# Altium PCB F407ZGT6.PcbDoc (part 3 of 7)
Units mil, origin at the board's own origin, x right, y up, seen from the top; angles counter-clockwise.
Board outline 4380 x 3940 mil, 2 copper layers (Top Layer, Bottom Layer); 88 components, 146 nets, 552 pads, 268 vias.
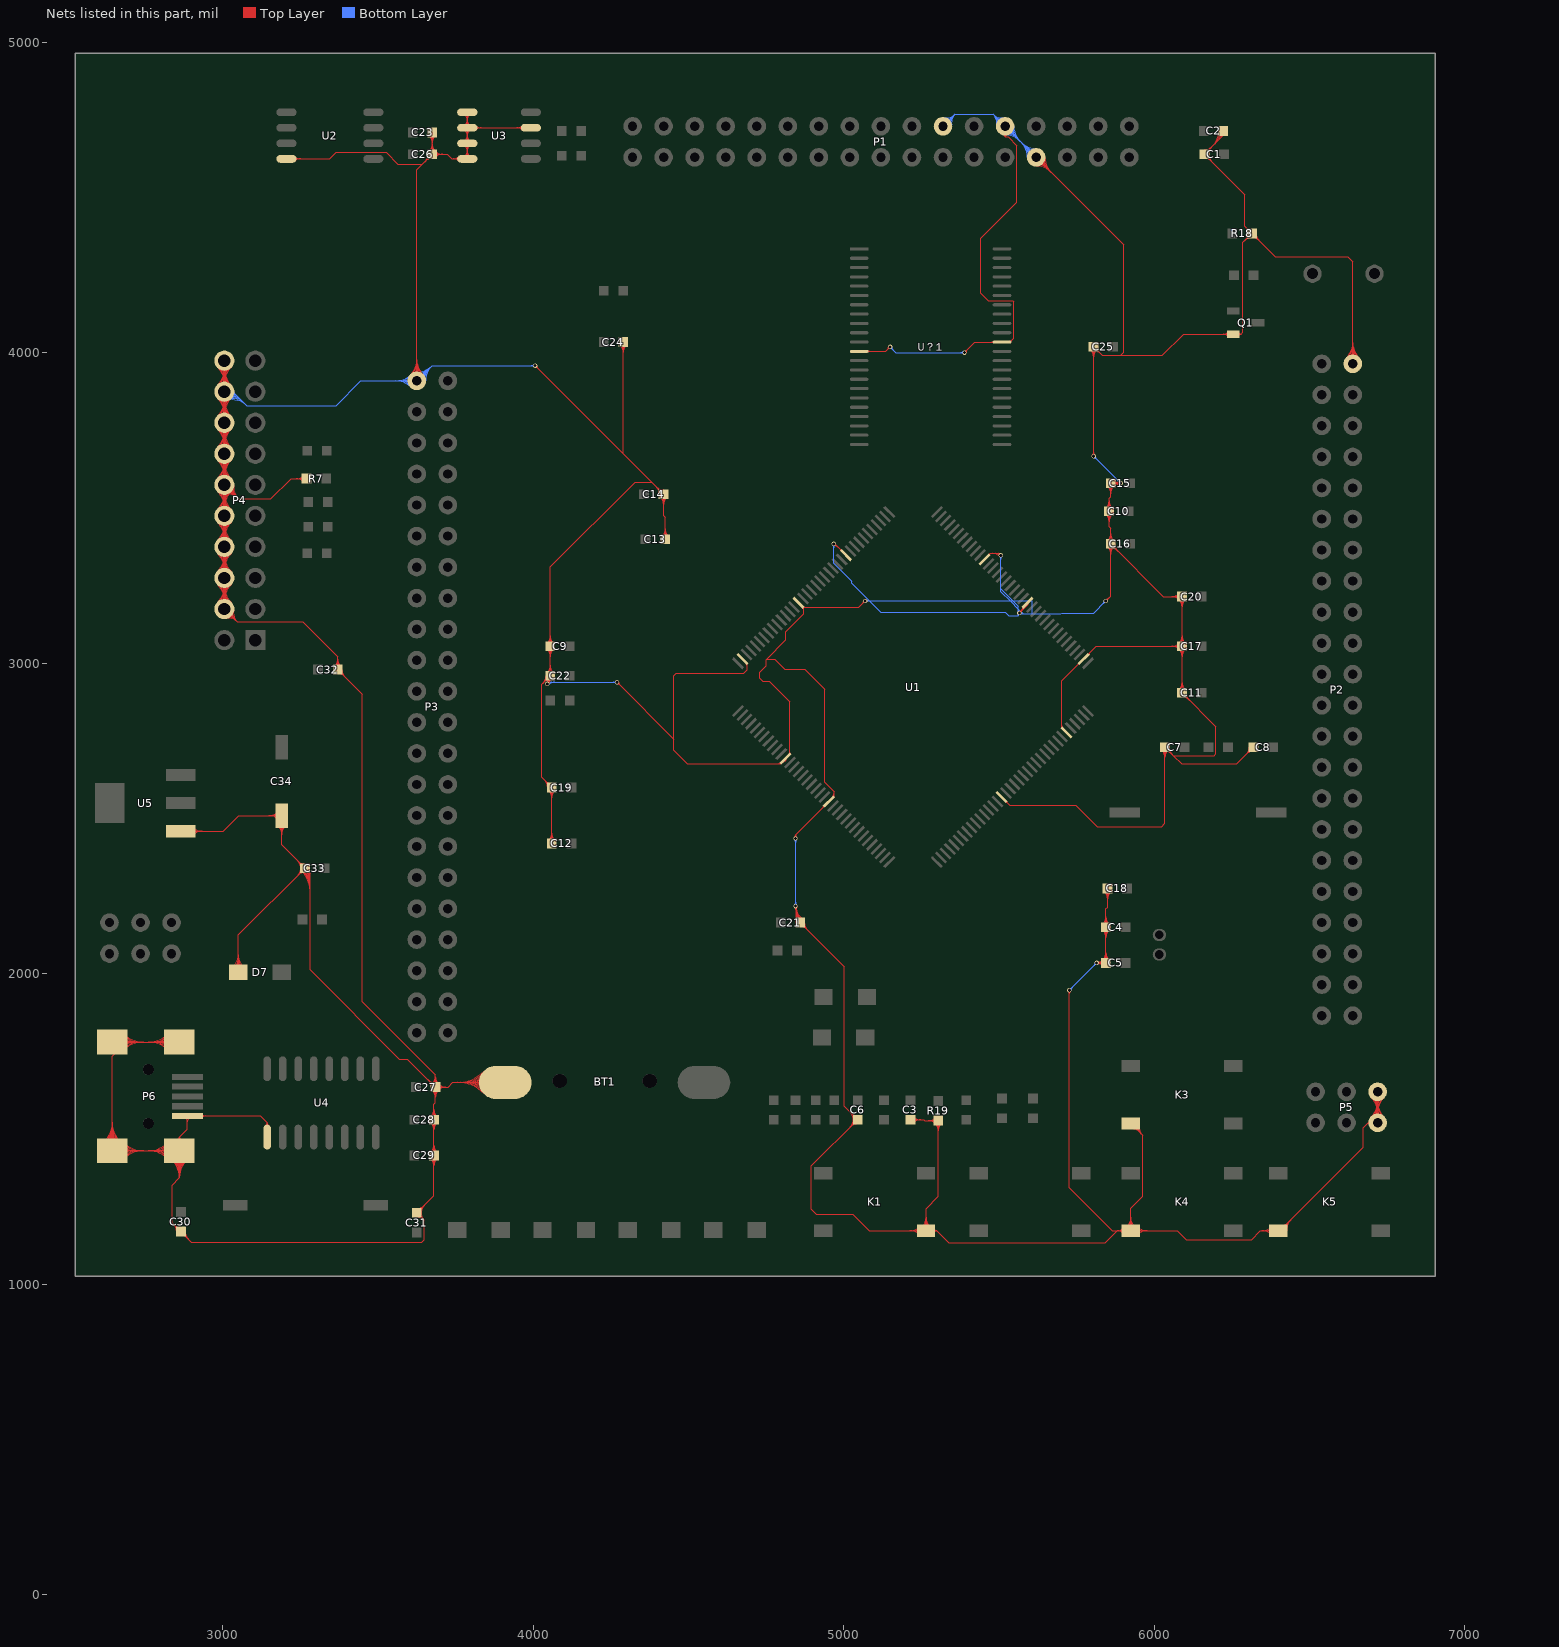
[diagram p3: the nets of this part, all layers, seen from the top]

## Via types
v1: diameter 14, hole 10, Top Layer to Bottom Layer, 265 vias
v2: diameter 150, hole 150, Top Layer to Bottom Layer, 3 vias

## Nets (pads, with @x,y where several pads share a name; then routed paths per layer and width w, separated by ;. In a path a pad name is that pad's centre, name@x,y a point inside that pad or via, vN(x,y) a via of type N, cw(c..) or ccw(c..) an arc to the next point about the centre after c; other vN are vias at no path point) (continued)
GND: BT1.2 C1.2 C2.2 C3.1 C4.1 C5.1 C6.1 C7.1 C8.1 C9.1 C10.1 C11.1 C12.1 C13.1 C14.1 C15.1 C16.1 C17.1 C18.1 C19.1 C20.1 C21.1 C22.1 C23.1 C24.1 C25.1 C26.1 C27.1 C28.1 C29.1 C30.1 C31.1 C32.1 C33.1 C34.2 D7.2 K1.4 K3.2 K4.2 K5.2 P1.22 P1.26 P1.27 P2.43 P3.44 P4.4 P4.6 P4.8 P4.10 P4.12 P4.14 P4.16 P4.18 P4.20 P5.5 P5.6 P6.5 P6.6 P6.7 P6.8 P6.9 Q1.2 R7.1 R18.1 R19.2 U1.16 U1.31 U1.38 U1.51 U1.61 U1.83 U1.94 U1.107 U1.120 U1.130 U2.4 U3.1 U3.2 U3.3 U3.4 U3.7 U4.1 U5.1 U？1.12 U？1.34 | length 58992.2
  Top Layer w4: P6.7@2616.99,1456.67 ccw(c2552.12,1521.54) 2643.86,1521.54 ccw(c2735.6,1521.54) P6.7@2670.73,1456.67 ; P6.7@2619.82,1453.85 ccw(c2561.77,1511.89) 2643.86,1511.89 ccw(c2725.94,1511.89) P6.7@2667.9,1453.85 ; P6.7@2622.64,1451.02 ccw(c2571.43,1502.23) 2643.86,1502.23 ccw(c2716.28,1502.23) P6.7@2665.07,1451.02 ; P6.7@2625.47,1448.19 ccw(c2581.09,1492.57) 2643.86,1492.57 ccw(c2706.63,1492.57) P6.7@2662.24,1448.19 ; P6.7@2628.3,1445.36 ccw(c2590.75,1482.92) 2643.86,1482.92 ccw(c2696.97,1482.92) P6.7@2659.41,1445.36 ; P6.7@2631.13,1442.53 ccw(c2600.4,1473.26) 2643.86,1473.26 ccw(c2687.31,1473.26) P6.7@2656.59,1442.53 ; P6.8@2643.86,1780.2 P6.8@2690,1780.2 ; P6.7@2665.8,1417.08 cw(c2696.53,1386.35) 2696.53,1429.8 cw(c2696.53,1473.26) P6.7@2665.8,1442.53 ; P6.8@2665.8,1767.47 cw(c2696.53,1736.74) 2696.53,1780.2 cw(c2696.53,1823.65) P6.8@2665.8,1792.92 ; P6.7@2668.63,1414.25 cw(c2706.18,1376.69) 2706.18,1429.8 cw(c2706.18,1482.92) P6.7@2668.63,1445.36 ; P6.8@2668.63,1764.64 cw(c2706.18,1727.08) 2706.18,1780.2 cw(c2706.18,1833.31) P6.8@2668.63,1795.75 ; P6.7@2671.46,1411.42 cw(c2715.84,1367.03) 2715.84,1429.8 cw(c2715.84,1492.57) P6.7@2671.46,1448.19 ; P6.8@2671.46,1761.81 cw(c2715.84,1717.43) 2715.84,1780.2 cw(c2715.84,1842.97) P6.8@2671.46,1798.58 ; P6.7@2674.28,1408.59 cw(c2725.5,1357.38) 2725.5,1429.8 cw(c2725.5,1502.23) P6.7@2674.28,1451.02 ; P6.8@2674.28,1758.98 cw(c2725.5,1707.77) 2725.5,1780.2 cw(c2725.5,1852.62) P6.8@2674.28,1801.41 ; P6.7@2677.11,1405.76 cw(c2735.15,1347.72) 2735.15,1429.8 cw(c2735.15,1511.89) P6.7@2677.11,1453.85 ; P6.8@2677.11,1756.15 cw(c2735.15,1698.11) 2735.15,1780.2 cw(c2735.15,1862.28) P6.8@2677.11,1804.24 ; P6.7@2679.94,1402.93 cw(c2744.81,1338.06) 2744.81,1429.8 cw(c2744.81,1521.54) P6.7@2679.94,1456.67 ; P6.8@2679.94,1753.33 cw(c2744.81,1688.46) 2744.81,1780.2 cw(c2744.81,1871.94) P6.8@2679.94,1807.07 ; P6.6@2824.31,1402.93 ccw(c2759.44,1338.06) 2759.44,1429.8 ccw(c2759.44,1521.54) P6.6@2824.31,1456.67 ; P6.9@2824.31,1753.33 ccw(c2759.44,1688.46) 2759.44,1780.2 ccw(c2759.44,1871.94) P6.9@2824.31,1807.07 ; P6.6@2827.14,1405.76 ccw(c2769.1,1347.72) 2769.1,1429.8 ccw(c2769.1,1511.89) P6.6@2827.14,1453.85 ; P6.9@2827.14,1756.15 ccw(c2769.1,1698.11) 2769.1,1780.2 ccw(c2769.1,1862.28) P6.9@2827.14,1804.24 ; P6.6@2829.97,1408.59 ccw(c2778.76,1357.38) 2778.76,1429.8 ccw(c2778.76,1502.23) P6.6@2829.97,1451.02 ; P6.9@2829.97,1758.98 ccw(c2778.76,1707.77) 2778.76,1780.2 ccw(c2778.76,1852.62) P6.9@2829.97,1801.41 ; P6.6@2832.8,1411.42 ccw(c2788.41,1367.03) 2788.41,1429.8 ccw(c2788.41,1492.57) P6.6@2832.8,1448.19 ; P6.9@2832.8,1761.81 ccw(c2788.41,1717.43) 2788.41,1780.2 ccw(c2788.41,1842.97) P6.9@2832.8,1798.58 ; P6.6@2834.62,1401.88 cw(c2780.26,1343.01) 2860.39,1343.01 ; P6.6@2835.63,1414.25 ccw(c2798.07,1376.69) 2798.07,1429.8 ccw(c2798.07,1482.92) P6.6@2835.63,1445.36 ; P6.9@2835.63,1764.64 ccw(c2798.07,1727.08) 2798.07,1780.2 ccw(c2798.07,1833.31) P6.9@2835.63,1795.75 ; P6.6@2837.33,1404.82 cw(c2788.7,1352.14) 2860.39,1352.14 cw(c2932.09,1352.14) P6.6@2883.46,1404.82 ; P6.6@2838.45,1417.08 ccw(c2807.73,1386.35) 2807.73,1429.8 ccw(c2807.73,1473.26) P6.6@2838.45,1442.53 ; P6.9@2838.45,1767.47 ccw(c2807.73,1736.74) 2807.73,1780.2 ccw(c2807.73,1823.65) P6.9@2838.45,1792.92 ; P6.6@2840.04,1407.76 cw(c2797.13,1361.28) 2860.39,1361.28 cw(c2923.66,1361.28) P6.6@2880.74,1407.76 ; P6.6@2842.76,1410.7 cw(c2805.57,1370.42) 2860.39,1370.42 cw(c2915.22,1370.42) P6.6@2878.03,1410.7 ; P6.6@2845.47,1413.64 cw(c2814,1379.55) 2860.39,1379.55 cw(c2906.79,1379.55) P6.6@2875.32,1413.64 ; P6.6@2848.18,1416.58 cw(c2822.44,1388.69) 2860.39,1388.69 cw(c2898.35,1388.69) P6.6@2872.6,1416.58 ; C30.1@2851.25,1170 ccw(c2818.06,1170) 2841.53,1193.47 ccw(c2865,1216.94) C30.1@2865,1183.75 ; C30.1@2855.25,1170 ccw(c2831.72,1170) 2848.36,1186.64 ccw(c2865,1203.28) C30.1@2865,1179.75 ; P6.6@2855.55,1467.49 ccw(c2854.84,1473) 2860.39,1473 ; P6.9@2860.39,1780.2 P6.8@2690,1780.2 ; U5.1@2864.17,2459.45 3001,2459.45 3051.32,2509.76 C34.2@3190,2509.76 3190,2415 C33.1@3265,2340 ; C30.1@2865,1156.25 cw(c2865,1123.06) 2888.47,1146.53 cw(c2911.94,1170) C30.1@2878.75,1170 ; C30.1@2865,1160.25 cw(c2865,1136.72) 2881.64,1153.36 cw(c2898.28,1170) C30.1@2874.75,1170 ; P6.6@2865.24,1467.49 cw(c2865.94,1473) 2860.39,1473 ; P6.5@2880.33,1536.35 cw(c2866.67,1522.69) 2885.98,1522.69 cw(c2905.3,1522.69) P6.5@2891.64,1536.35 ; P6.6@2886.17,1401.88 ccw(c2940.53,1343.01) 2860.39,1343.01 ; U5.1@2898.58,2452.6 cw(c2915.11,2436.07) 2915.11,2459.45 cw(c2915.11,2482.83) U5.1@2898.58,2466.3 ; U5.1@2901.41,2449.77 cw(c2924.77,2426.41) 2924.77,2459.45 cw(c2924.77,2492.49) U5.1@2901.41,2469.12 ; U5.1@2904.24,2446.94 cw(c2934.43,2416.75) 2934.43,2459.45 cw(c2934.43,2502.14) U5.1@2904.24,2471.95 ; P6.5@2931.64,1536.35 cw(c2945.3,1522.69) 2945.3,1542.01 cw(c2945.3,1561.32) P6.5@2931.64,1547.66 ; P4.4@2983.43,3196.57 ccw(c2931.37,3248.63) 3005,3248.63 ccw(c3078.63,3248.63) P4.4@3026.57,3196.57 ; P4.6@2983.43,3253.43 cw(c2931.37,3201.37) 3005,3201.37 cw(c3078.63,3201.37) P4.6@3026.57,3253.43 ; P4.6@2983.43,3296.57 ccw(c2931.37,3348.63) 3005,3348.63 ccw(c3078.63,3348.63) P4.6@3026.57,3296.57 ; P4.8@2983.43,3353.43 cw(c2931.37,3301.37) 3005,3301.37 cw(c3078.63,3301.37) P4.8@3026.57,3353.43 ; P4.8@2983.43,3396.57 ccw(c2931.37,3448.63) 3005,3448.63 ccw(c3078.63,3448.63) P4.8@3026.57,3396.57 ; P4.10@2983.43,3453.43 cw(c2931.37,3401.37) 3005,3401.37 cw(c3078.63,3401.37) P4.10@3026.57,3453.43 ; P4.10@2983.43,3496.57 ccw(c2931.37,3548.63) 3005,3548.63 ccw(c3078.63,3548.63) P4.10@3026.57,3496.57 ; P4.12@2983.43,3553.43 cw(c2931.37,3501.37) 3005,3501.37 cw(c3078.63,3501.37) P4.12@3026.57,3553.43 ; P4.12@2983.43,3596.57 ccw(c2931.37,3648.63) 3005,3648.63 ccw(c3078.63,3648.63) P4.12@3026.57,3596.57 ; P4.14@2983.43,3653.43 cw(c2931.37,3601.37) 3005,3601.37 cw(c3078.63,3601.37) P4.14@3026.57,3653.43 ; P4.14@2983.43,3696.57 ccw(c2931.37,3748.63) 3005,3748.63 ccw(c3078.63,3748.63) P4.14@3026.57,3696.57 ; P4.16@2983.43,3753.43 cw(c2931.37,3701.37) 3005,3701.37 cw(c3078.63,3701.37) P4.16@3026.57,3753.43 ; P4.16@2983.43,3796.57 ccw(c2931.37,3848.63) 3005,3848.63 ccw(c3078.63,3848.63) P4.16@3026.57,3796.57 ; P4.18@2983.43,3853.43 cw(c2931.37,3801.37) 3005,3801.37 cw(c3078.63,3801.37) P4.18@3026.57,3853.43 ; P4.18@2983.43,3896.57 ccw(c2931.37,3948.63) 3005,3948.63 ccw(c3078.63,3948.63) P4.18@3026.57,3896.57 ; P4.20@2983.43,3953.43 cw(c2931.37,3901.37) 3005,3901.37 cw(c3078.63,3901.37) P4.20@3026.57,3953.43 ; P4.4@2986.26,3193.74 ccw(c2941.02,3238.98) 3005,3238.98 ccw(c3068.98,3238.98) P4.4@3023.74,3193.74 ; P4.6@2986.26,3256.26 cw(c2941.02,3211.02) 3005,3211.02 cw(c3068.98,3211.02) P4.6@3023.74,3256.26 ; P4.6@2986.26,3293.74 ccw(c2941.02,3338.98) 3005,3338.98 ccw(c3068.98,3338.98) P4.6@3023.74,3293.74 ; P4.8@2986.26,3356.26 cw(c2941.02,3311.02) 3005,3311.02 cw(c3068.98,3311.02) P4.8@3023.74,3356.26 ; P4.8@2986.26,3393.74 ccw(c2941.02,3438.98) 3005,3438.98 ccw(c3068.98,3438.98) P4.8@3023.74,3393.74 ; P4.10@2986.26,3456.26 cw(c2941.02,3411.02) 3005,3411.02 cw(c3068.98,3411.02) P4.10@3023.74,3456.26 ; P4.10@2986.26,3493.74 ccw(c2941.02,3538.98) 3005,3538.98 ccw(c3068.98,3538.98) P4.10@3023.74,3493.74 ; P4.12@2986.26,3556.26 cw(c2941.02,3511.02) 3005,3511.02 cw(c3068.98,3511.02) P4.12@3023.74,3556.26 ; P4.12@2986.26,3593.74 ccw(c2941.02,3638.98) 3005,3638.98 ccw(c3068.98,3638.98) P4.12@3023.74,3593.74 ; P4.14@2986.26,3656.26 cw(c2941.02,3611.02) 3005,3611.02 cw(c3068.98,3611.02) P4.14@3023.74,3656.26 ; P4.14@2986.26,3693.74 ccw(c2941.02,3738.98) 3005,3738.98 ccw(c3068.98,3738.98) P4.14@3023.74,3693.74 ; P4.16@2986.26,3756.26 cw(c2941.02,3711.02) 3005,3711.02 cw(c3068.98,3711.02) P4.16@3023.74,3756.26 ; P4.16@2986.26,3793.74 ccw(c2941.02,3838.98) 3005,3838.98 ccw(c3068.98,3838.98) P4.16@3023.74,3793.74 ; P4.18@2986.26,3856.26 cw(c2941.02,3811.02) 3005,3811.02 cw(c3068.98,3811.02) P4.18@3023.74,3856.26 ; P4.18@2986.26,3893.74 ccw(c2941.02,3938.98) 3005,3938.98 ccw(c3068.98,3938.98) P4.18@3023.74,3893.74 ; P4.20@2986.26,3956.26 cw(c2941.02,3911.02) 3005,3911.02 cw(c3068.98,3911.02) P4.20@3023.74,3956.26 ; P4.4@2989.09,3190.91 ccw(c2950.68,3229.32) 3005,3229.32 ccw(c3059.32,3229.32) P4.4@3020.91,3190.91 ; P4.6@2989.09,3259.09 cw(c2950.68,3220.68) 3005,3220.68 cw(c3059.32,3220.68) P4.6@3020.91,3259.09 ; P4.6@2989.09,3290.91 ccw(c2950.68,3329.32) 3005,3329.32 ccw(c3059.32,3329.32) P4.6@3020.91,3290.91 ; P4.8@2989.09,3359.09 cw(c2950.68,3320.68) 3005,3320.68 cw(c3059.32,3320.68) P4.8@3020.91,3359.09 ; P4.8@2989.09,3390.91 ccw(c2950.68,3429.32) 3005,3429.32 ccw(c3059.32,3429.32) P4.8@3020.91,3390.91 ; P4.10@2989.09,3459.09 cw(c2950.68,3420.68) 3005,3420.68 cw(c3059.32,3420.68) P4.10@3020.91,3459.09 ; P4.10@2989.09,3490.91 ccw(c2950.68,3529.32) 3005,3529.32 ccw(c3059.32,3529.32) P4.10@3020.91,3490.91 ; P4.12@2989.09,3559.09 cw(c2950.68,3520.68) 3005,3520.68 cw(c3059.32,3520.68) P4.12@3020.91,3559.09 ; P4.12@2989.09,3590.91 ccw(c2950.68,3629.32) 3005,3629.32 ccw(c3059.32,3629.32) P4.12@3020.91,3590.91 ; P4.14@2989.09,3659.09 cw(c2950.68,3620.68) 3005,3620.68 cw(c3059.32,3620.68) P4.14@3020.91,3659.09 ; P4.14@2989.09,3690.91 ccw(c2950.68,3729.32) 3005,3729.32 ccw(c3059.32,3729.32) P4.14@3020.91,3690.91 ; P4.16@2989.09,3759.09 cw(c2950.68,3720.68) 3005,3720.68 cw(c3059.32,3720.68) P4.16@3020.91,3759.09 ; P4.16@2989.09,3790.91 ccw(c2950.68,3829.32) 3005,3829.32 ccw(c3059.32,3829.32) P4.16@3020.91,3790.91 ; P4.18@2989.09,3859.09 cw(c2950.68,3820.68) 3005,3820.68 cw(c3059.32,3820.68) P4.18@3020.91,3859.09 ; P4.18@2989.09,3890.91 ccw(c2950.68,3929.32) 3005,3929.32 ccw(c3059.32,3929.32) P4.18@3020.91,3890.91 ; P4.20@2989.09,3959.09 cw(c2950.68,3920.68) 3005,3920.68 cw(c3059.32,3920.68) P4.20@3020.91,3959.09 ; P4.4@2991.92,3188.08 ccw(c2960.34,3219.66) 3005,3219.66 ccw(c3049.66,3219.66) P4.4@3018.08,3188.08 ; P4.6@2991.92,3261.92 cw(c2960.34,3230.34) 3005,3230.34 cw(c3049.66,3230.34) P4.6@3018.08,3261.92 ; P4.6@2991.92,3288.08 ccw(c2960.34,3319.66) 3005,3319.66 ccw(c3049.66,3319.66) P4.6@3018.08,3288.08 ; P4.8@2991.92,3361.92 cw(c2960.34,3330.34) 3005,3330.34 cw(c3049.66,3330.34) P4.8@3018.08,3361.92 ; P4.8@2991.92,3388.08 ccw(c2960.34,3419.66) 3005,3419.66 ccw(c3049.66,3419.66) P4.8@3018.08,3388.08 ; P4.10@2991.92,3461.92 cw(c2960.34,3430.34) 3005,3430.34 cw(c3049.66,3430.34) P4.10@3018.08,3461.92 ; P4.10@2991.92,3488.08 ccw(c2960.34,3519.66) 3005,3519.66 ccw(c3049.66,3519.66) P4.10@3018.08,3488.08 ; P4.12@2991.92,3561.92 cw(c2960.34,3530.34) 3005,3530.34 cw(c3049.66,3530.34) P4.12@3018.08,3561.92 ; P4.12@2991.92,3588.08 ccw(c2960.34,3619.66) 3005,3619.66 ccw(c3049.66,3619.66) P4.12@3018.08,3588.08 ; P4.14@2991.92,3661.92 cw(c2960.34,3630.34) 3005,3630.34 cw(c3049.66,3630.34) P4.14@3018.08,3661.92 ; P4.14@2991.92,3688.08 ccw(c2960.34,3719.66) 3005,3719.66 ccw(c3049.66,3719.66) P4.14@3018.08,3688.08 ; P4.16@2991.92,3761.92 cw(c2960.34,3730.34) 3005,3730.34 cw(c3049.66,3730.34) P4.16@3018.08,3761.92 ; P4.16@2991.92,3788.08 ccw(c2960.34,3819.66) 3005,3819.66 ccw(c3049.66,3819.66) P4.16@3018.08,3788.08 ; P4.18@2991.92,3861.92 cw(c2960.34,3830.34) 3005,3830.34 cw(c3049.66,3830.34) P4.18@3018.08,3861.92 ; P4.18@2991.92,3888.08 ccw(c2960.34,3919.66) 3005,3919.66 ccw(c3049.66,3919.66) P4.18@3018.08,3888.08 ; P4.20@2991.92,3961.92 cw(c2960.34,3930.34) 3005,3930.34 cw(c3049.66,3930.34) P4.20@3018.08,3961.92 ; P4.4@2994.75,3185.25 ccw(c2969.99,3210.01) 3005,3210.01 ccw(c3040.01,3210.01) P4.4@3015.25,3185.25 ; P4.6@2994.75,3264.75 cw(c2969.99,3239.99) 3005,3239.99 cw(c3040.01,3239.99) P4.6@3015.25,3264.75 ; P4.6@2994.75,3285.25 ccw(c2969.99,3310.01) 3005,3310.01 ccw(c3040.01,3310.01) P4.6@3015.25,3285.25 ; P4.8@2994.75,3364.75 cw(c2969.99,3339.99) 3005,3339.99 cw(c3040.01,3339.99) P4.8@3015.25,3364.75 ; P4.8@2994.75,3385.25 ccw(c2969.99,3410.01) 3005,3410.01 ccw(c3040.01,3410.01) P4.8@3015.25,3385.25 ; P4.10@2994.75,3464.75 cw(c2969.99,3439.99) 3005,3439.99 cw(c3040.01,3439.99) P4.10@3015.25,3464.75 ; P4.10@2994.75,3485.25 ccw(c2969.99,3510.01) 3005,3510.01 ccw(c3040.01,3510.01) P4.10@3015.25,3485.25 ; P4.12@2994.75,3564.75 cw(c2969.99,3539.99) 3005,3539.99 cw(c3040.01,3539.99) P4.12@3015.25,3564.75 ; P4.12@2994.75,3585.25 ccw(c2969.99,3610.01) 3005,3610.01 ccw(c3040.01,3610.01) P4.12@3015.25,3585.25 ; P4.14@2994.75,3664.75 cw(c2969.99,3639.99) 3005,3639.99 cw(c3040.01,3639.99) P4.14@3015.25,3664.75 ; P4.14@2994.75,3685.25 ccw(c2969.99,3710.01) 3005,3710.01 ccw(c3040.01,3710.01) P4.14@3015.25,3685.25 ; P4.16@2994.75,3764.75 cw(c2969.99,3739.99) 3005,3739.99 cw(c3040.01,3739.99) P4.16@3015.25,3764.75 ; P4.16@2994.75,3785.25 ccw(c2969.99,3810.01) 3005,3810.01 ccw(c3040.01,3810.01) P4.16@3015.25,3785.25 ; P4.18@2994.75,3864.75 cw(c2969.99,3839.99) 3005,3839.99 cw(c3040.01,3839.99) P4.18@3015.25,3864.75 ; P4.18@2994.75,3885.25 ccw(c2969.99,3910.01) 3005,3910.01 ccw(c3040.01,3910.01) P4.18@3015.25,3885.25 ; P4.20@2994.75,3964.75 cw(c2969.99,3939.99) 3005,3939.99 cw(c3040.01,3939.99) P4.20@3015.25,3964.75 ; P4.20@3005,3975 P4.18@3005,3875 P4.16@3005,3775 P4.14@3005,3675 P4.12@3005,3575 ; P4.12@3007,3556.61 cw(c3010.36,3525.77) 3032.29,3547.71 cw(c3054.23,3569.64) P4.12@3023.39,3573 ; P4.12@3007.44,3552.63 cw(c3011.52,3515.13) 3038.2,3541.8 cw(c3064.87,3568.48) P4.12@3027.37,3572.56 ; P4.12@3007.87,3548.66 cw(c3012.68,3504.49) 3044.1,3535.9 cw(c3075.51,3567.32) P4.12@3031.34,3572.13 ; P4.12@3008.3,3544.68 cw(c3013.84,3493.84) 3050,3530 ; P4.4@3008.37,3156.81 cw(c3012.77,3133.04) 3029.87,3150.13 cw(c3046.96,3167.23) P4.4@3023.19,3171.63 ; P4.4@3009.1,3152.88 cw(c3014.45,3123.96) 3035.24,3144.76 cw(c3056.04,3165.55) P4.4@3027.12,3170.9 ; P4.4@3009.83,3148.94 cw(c3016.13,3114.89) 3040.62,3139.38 cw(c3065.11,3163.87) P4.4@3031.06,3170.17 ; P4.4@3010.55,3145.01 cw(c3017.81,3105.82) 3046,3134 ; D7.2@3033.32,2021.68 ccw(c2993.05,2061.95) 3050,2061.95 ccw(c3106.95,2061.95) D7.2@3066.68,2021.68 ; P4.4@3034.99,3169.45 ccw(c3074.18,3162.19) 3046,3134 ; P4.12@3035.32,3571.7 ccw(c3086.16,3566.16) 3050,3530 ; D7.2@3036.15,2018.85 ccw(c3002.7,2052.3) 3050,2052.3 ccw(c3097.3,2052.3) D7.2@3063.85,2018.85 ; D7.2@3038.98,2016.02 ccw(c3012.36,2042.64) 3050,2042.64 ccw(c3087.64,2042.64) D7.2@3061.02,2016.02 ; D7.2@3041.8,2013.2 ccw(c3022.02,2032.98) 3050,2032.98 ccw(c3077.98,2032.98) D7.2@3058.2,2013.2 ; D7.2@3050,2005 3050,2125 C33.1@3265,2340 ; U4.1@3137.72,1510.49 ccw(c3131.8,1520) 3143,1520 ; U4.1@3143,1474 3143,1520 ; U4.1@3148.28,1510.49 cw(c3154.2,1520) 3143,1520 ; C34.2@3177.49,2477.57 cw(c3147.3,2447.38) 3190,2447.38 cw(c3232.7,2447.38) C34.2@3202.51,2477.57 ; C34.2@3177.49,2497.26 ccw(c3147.3,2467.07) 3147.3,2509.76 ccw(c3147.3,2552.46) C34.2@3177.49,2522.27 ; C34.2@3180.32,2480.4 cw(c3156.96,2457.04) 3190,2457.04 cw(c3223.04,2457.04) C34.2@3199.68,2480.4 ; C34.2@3180.32,2500.09 ccw(c3156.96,2476.73) 3156.96,2509.76 ccw(c3156.96,2542.8) C34.2@3180.32,2519.44 ; C34.2@3183.15,2483.23 cw(c3166.62,2466.7) 3190,2466.7 cw(c3213.38,2466.7) C34.2@3196.85,2483.23 ; C34.2@3183.15,2502.92 ccw(c3166.62,2486.38) 3166.62,2509.76 ccw(c3166.62,2533.15) C34.2@3183.15,2516.61 ; U2.4@3205,4625 3345,4625 3366,4646 3526,4646 3564,4608 3643,4608 ; U2.4@3229.6,4620.4 cw(c3240.69,4609.31) 3240.69,4625 cw(c3240.69,4640.69) U2.4@3229.6,4629.6 ; U2.4@3232.42,4617.58 cw(c3250.35,4599.65) 3250.35,4625 cw(c3250.35,4650.35) U2.4@3232.42,4632.42 ; C33.1@3255.28,2330.28 cw(c3193.18,2268.18) 3281,2268.18 ; C33.1@3258.11,2333.11 cw(c3202.84,2277.84) 3281,2277.84 ; R7.1@3260.28,3585.28 ccw(c3236.81,3561.81) 3236.81,3595 ccw(c3236.81,3628.19) R7.1@3260.28,3604.72 ; C33.1@3260.94,2335.94 cw(c3212.5,2287.5) 3281,2287.5 ; R7.1@3263.11,3588.11 ccw(c3246.47,3571.47) 3246.47,3595 ccw(c3246.47,3618.53) R7.1@3263.11,3601.89 ; C33.1@3263.76,2338.76 cw(c3222.15,2297.15) 3281,2297.15 ; C33.1@3265,2326.25 ccw(c3265,2293.06) 3241.53,2316.53 ccw(c3218.06,2340) 3251.25,2340 ccw(c3218.06,2340) 3241.53,2363.47 ccw(c3265,2386.94) C33.1@3265,2353.75 ; C33.1@3265,2330.25 ccw(c3265,2306.72) 3248.36,2323.36 ccw(c3231.72,2340) 3255.25,2340 ccw(c3231.72,2340) 3248.36,2356.64 ccw(c3265,2373.28) C33.1@3265,2349.75 ; C33.1@3266.59,2341.59 cw(c3231.81,2306.81) 3281,2306.81 ; C33.1@3267.94,2330.71 cw(c3270.46,2322.77) 3276.34,2328.66 cw(c3282.23,2334.54) C33.1@3274.29,2337.06 ; C33.1@3269.15,2326.89 cw(c3272.69,2315.7) 3281,2324 ; C33.1@3269.42,2344.42 cw(c3241.47,2316.47) 3281,2316.47 ; R7.1@3270,3595 3220,3595 3155,3530 3050,3530 ; C33.1@3278.11,2335.85 ccw(c3289.3,2332.31) 3281,2324 ; C32.1@3360.28,2989.72 ccw(c3336.81,3013.19) 3370,3013.19 ccw(c3403.19,3013.19) C32.1@3379.72,2989.72 ; C32.1@3363.11,2986.89 ccw(c3346.47,3003.53) 3370,3003.53 ccw(c3393.53,3003.53) C32.1@3376.89,2986.89 ; C32.1@3370,2966.25 cw(c3370,2933.06) 3393.47,2956.53 cw(c3416.94,2980) C32.1@3383.75,2980 ; C32.1@3370,2970.25 cw(c3370,2946.72) 3386.64,2963.36 cw(c3403.28,2980) C32.1@3379.75,2980 ; P3.44@3605.2,3929.8 ccw(c3557.4,3977.6) 3625,3977.6 ccw(c3692.6,3977.6) P3.44@3644.8,3929.8 ; P3.44@3608.03,3926.97 ccw(c3567.06,3967.94) 3625,3967.94 ccw(c3682.94,3967.94) P3.44@3641.97,3926.97 ; P3.44@3610.86,3924.14 ccw(c3576.72,3958.28) 3625,3958.28 ccw(c3673.28,3958.28) P3.44@3639.14,3924.14 ; P3.44@3613.69,3921.31 ccw(c3586.37,3948.63) 3625,3948.63 ccw(c3663.63,3948.63) P3.44@3636.31,3921.31 ; C31.1@3625,1216.25 cw(c3625,1183.06) 3648.47,1206.53 cw(c3671.94,1230) 3638.75,1230 cw(c3671.94,1230) 3648.47,1253.47 cw(c3625,1276.94) C31.1@3625,1243.75 ; C31.1@3625,1220.25 cw(c3625,1196.72) 3641.64,1213.36 cw(c3658.28,1230) 3634.75,1230 cw(c3658.28,1230) 3641.64,1246.64 cw(c3625,1263.28) C31.1@3625,1239.75 ; P3.44@3625,3910 3625,4590 3643,4608 ; C26.1@3661.25,4640 cw(c3628.06,4640) 3651.53,4616.53 cw(c3675,4593.06) C26.1@3675,4626.25 ; C26.1@3665.25,4640 cw(c3641.72,4640) 3658.36,4623.36 cw(c3675,4606.72) C26.1@3675,4630.25 ; C26.1@3665.28,4649.72 ccw(c3641.81,4673.19) 3675,4673.19 ccw(c3708.19,4673.19) 3684.72,4649.72 ccw(c3708.19,4673.19) 3708.19,4640 ccw(c3708.19,4606.81) C26.1@3684.72,4630.28 ; C23.1@3665.28,4700.28 cw(c3641.81,4676.81) 3675,4676.81 cw(c3708.19,4676.81) C23.1@3684.72,4700.28 ; C26.1@3668.11,4646.89 ccw(c3651.47,4663.53) 3675,4663.53 ccw(c3698.53,4663.53) 3681.89,4646.89 ccw(c3698.53,4663.53) 3698.53,4640 ccw(c3698.53,4616.47) C26.1@3681.89,4633.11 ; C23.1@3668.11,4703.11 cw(c3651.47,4686.47) 3675,4686.47 cw(c3698.53,4686.47) C23.1@3681.89,4703.11 ; C29.1@3670.28,1405.28 cw(c3646.81,1381.81) 3680,1381.81 cw(c3713.19,1381.81) C29.1@3689.72,1405.28 ; C29.1@3670.28,1424.72 ccw(c3646.81,1448.19) 3680,1448.19 ccw(c3713.19,1448.19) C29.1@3689.72,1424.72 ; C28.1@3670.28,1520.28 cw(c3646.81,1496.81) 3680,1496.81 cw(c3713.19,1496.81) C28.1@3689.72,1520.28 ; C28.1@3670.28,1539.72 ccw(c3646.81,1563.19) 3680,1563.19 ccw(c3713.19,1563.19) C28.1@3689.72,1539.72 ; C27.1@3671.25,1635 ccw(c3638.06,1635) 3661.53,1658.47 ccw(c3685,1681.94) C27.1@3685,1648.75 ; C29.1@3673.11,1408.11 cw(c3656.47,1391.47) 3680,1391.47 cw(c3703.53,1391.47) C29.1@3686.89,1408.11 ; C29.1@3673.11,1421.89 ccw(c3656.47,1438.53) 3680,1438.53 ccw(c3703.53,1438.53) C29.1@3686.89,1421.89 ; C28.1@3673.11,1523.11 cw(c3656.47,1506.47) 3680,1506.47 cw(c3703.53,1506.47) C28.1@3686.89,1523.11 ; C28.1@3673.11,1536.89 ccw(c3656.47,1553.53) 3680,1553.53 ccw(c3703.53,1553.53) C28.1@3686.89,1536.89 ; C23.1@3675,4710 C26.1@3675,4640 ; C27.1@3675.25,1635 ccw(c3651.72,1635) 3668.36,1651.64 ccw(c3685,1668.28) C27.1@3685,1644.75 ; C27.1@3675.28,1625.28 cw(c3651.81,1601.81) 3685,1601.81 cw(c3718.19,1601.81) 3694.72,1625.28 cw(c3718.19,1601.81) 3718.19,1635 cw(c3718.19,1668.19) 3694.72,1644.72 cw(c3718.19,1668.19) 3685,1668.19 cw(c3651.81,1668.19) C27.1@3675.28,1644.72 ; C27.1@3678.11,1628.11 cw(c3661.47,1611.47) 3685,1611.47 cw(c3708.53,1611.47) 3691.89,1628.11 cw(c3708.53,1611.47) 3708.53,1635 cw(c3708.53,1658.53) 3691.89,1641.89 cw(c3708.53,1658.53) 3685,1658.53 cw(c3661.47,1658.53) C27.1@3678.11,1641.89 ; U3.4@3760.21,4617.58 ccw(c3742.29,4599.65) 3742.29,4625 ccw(c3742.29,4650.35) U3.4@3760.21,4632.42 ; U3.4@3763.04,4620.4 ccw(c3751.95,4609.31) 3751.95,4625 ccw(c3751.95,4640.69) U3.4@3763.04,4629.6 ; U3.4@3780.21,4632.42 ccw(c3762.29,4650.35) 3787.64,4650.35 ccw(c3812.99,4650.35) U3.4@3795.06,4632.42 ; U3.3@3780.21,4667.58 cw(c3762.29,4649.65) 3787.64,4649.65 cw(c3812.99,4649.65) U3.3@3795.06,4667.58 ; U3.3@3780.21,4682.42 ccw(c3762.29,4700.35) 3787.64,4700.35 ccw(c3812.99,4700.35) U3.3@3795.06,4682.42 ; U3.2@3780.21,4717.58 cw(c3762.29,4699.65) 3787.64,4699.65 cw(c3812.99,4699.65) U3.2@3795.06,4717.58 ; U3.2@3780.21,4732.42 ccw(c3762.29,4750.35) 3787.64,4750.35 ccw(c3812.99,4750.35) U3.2@3795.06,4732.42 ; U3.1@3780.21,4767.58 cw(c3762.29,4749.65) 3787.64,4749.65 cw(c3812.99,4749.65) U3.1@3795.06,4767.58 ; U3.4@3783.04,4629.6 ccw(c3771.95,4640.69) 3787.64,4640.69 ccw(c3803.33,4640.69) U3.4@3792.23,4629.6 ; U3.3@3783.04,4670.4 cw(c3771.95,4659.31) 3787.64,4659.31 cw(c3803.33,4659.31) U3.3@3792.23,4670.4 ; U3.3@3783.04,4679.6 ccw(c3771.95,4690.69) 3787.64,4690.69 ccw(c3803.33,4690.69) U3.3@3792.23,4679.6 ; U3.2@3783.04,4720.4 cw(c3771.95,4709.31) 3787.64,4709.31 cw(c3803.33,4709.31) U3.2@3792.23,4720.4 ; U3.2@3783.04,4729.6 ccw(c3771.95,4740.69) 3787.64,4740.69 ccw(c3803.33,4740.69) U3.2@3792.23,4729.6 ; U3.1@3783.04,4770.4 cw(c3771.95,4759.31) 3787.64,4759.31 cw(c3803.33,4759.31) U3.1@3792.23,4770.4 ; U3.1@3787.64,4775 U3.2@3787.64,4725 ; U3.2@3812.23,4720.4 cw(c3823.33,4709.31) 3823.33,4725 cw(c3823.33,4740.69) U3.2@3812.23,4729.6 ; U3.2@3815.06,4717.58 cw(c3832.99,4699.65) 3832.99,4725 cw(c3832.99,4750.35) U3.2@3815.06,4732.42 ; BT1.2@3842.34,1613.83 ccw(c3755.02,1526.51) 3755.02,1650 ccw(c3755.02,1773.49) BT1.2@3842.34,1686.17 ; BT1.2@3845.16,1616.66 ccw(c3764.67,1536.17) 3764.67,1650 ccw(c3764.67,1763.83) BT1.2@3845.16,1683.34 ; BT1.2@3847.99,1619.49 ccw(c3774.33,1545.83) 3774.33,1650 ccw(c3774.33,1754.17) BT1.2@3847.99,1680.51 ; BT1.2@3850.82,1622.32 ccw(c3783.99,1555.48) 3783.99,1650 ccw(c3783.99,1744.52) BT1.2@3850.82,1677.68 ; BT1.2@3853.65,1625.15 ccw(c3793.65,1565.14) 3793.65,1650 ccw(c3793.65,1734.86) BT1.2@3853.65,1674.85 ; BT1.2@3856.48,1627.97 ccw(c3803.3,1574.8) 3803.3,1650 ccw(c3803.3,1725.2) BT1.2@3856.48,1672.03 ; BT1.2@3859.31,1630.8 ccw(c3812.96,1584.46) 3812.96,1650 ccw(c3812.96,1715.54) BT1.2@3859.31,1669.2 ; BT1.2@3862.13,1633.63 ccw(c3822.62,1594.11) 3822.62,1650 ccw(c3822.62,1705.89) BT1.2@3862.13,1666.37 ; BT1.2@3910,1650 3741,1650 3726,1635 C27.1@3685,1635 ; U3.7@3964.94,4717.58 ccw(c3947.01,4699.65) 3947.01,4725 ccw(c3947.01,4750.35) U3.7@3964.94,4732.42 ; U3.7@3967.77,4720.4 ccw(c3956.67,4709.31) 3956.67,4725 ccw(c3956.67,4740.69) U3.7@3967.77,4729.6 ; U3.7@3992.36,4725 U3.2@3787.64,4725 ; v1@4006,3954 cw(c4006,3941.93) 4014.54,3950.46 cw(c4023.07,3959) v1@4011,3959 ; v1(4006,3959) 4290,3675 ; C22.1@4041.25,2960 cw(c4008.06,2960) 4031.53,2936.53 cw(c4055,2913.06) C22.1@4055,2946.25 ; v1@4044.18,2938.93 ccw(c4041.78,2953.25) C22.1@4054.35,2945.99 ; v1@4044.97,2939 ccw(c4044.92,2946.24) 4051.19,2942.62 ; v1@4045,2939 ccw(c4045,2951.07) 4053.54,2942.54 ccw(c4062.07,2934) v1@4050,2934 ; C22.1@4045.13,2950.43 cw(c4036.72,2942.28) v1(4045,2934) 4055,2944 ; C22.1@4045.25,2960 cw(c4021.72,2960) 4038.36,2943.36 cw(c4055,2926.72) C22.1@4055,2950.25 ; C22.1@4045.28,2969.72 ccw(c4021.81,2993.19) 4055,2993.19 ccw(c4088.19,2993.19) C22.1@4064.72,2969.72 ; C9.1@4045.28,3045.28 cw(c4021.81,3021.81) 4055,3021.81 cw(c4088.19,3021.81) C9.1@4064.72,3045.28 ; C9.1@4045.28,3064.72 ccw(c4021.81,3088.19) 4055,3088.19 ccw(c4088.19,3088.19) C9.1@4064.72,3064.72 ; C19.1@4046.25,2600 ccw(c4013.06,2600) 4036.53,2623.47 ccw(c4060,2646.94) C19.1@4060,2613.75 ; v1@4046.39,2938.8 ccw(c4047.6,2942.96) 4051.35,2940.8 ; v1@4047.87,2936.87 ccw(c4039.64,2945.11) C22.1@4048,2953.22 ; C22.1@4048.11,2966.89 ccw(c4031.47,2983.53) 4055,2983.53 ccw(c4078.53,2983.53) C22.1@4061.89,2966.89 ; C9.1@4048.11,3048.11 cw(c4031.47,3031.47) 4055,3031.47 cw(c4078.53,3031.47) C9.1@4061.89,3048.11 ; C9.1@4048.11,3061.89 ccw(c4031.47,3078.53) 4055,3078.53 ccw(c4078.53,3078.53) C9.1@4061.89,3061.89 ; C19.1@4050.25,2600 ccw(c4026.72,2600) 4043.36,2616.64 ccw(c4060,2633.28) C19.1@4060,2609.75 ; C12.1@4050.28,2429.72 ccw(c4026.81,2453.19) 4060,2453.19 ccw(c4093.19,2453.19) C12.1@4069.72,2429.72 ; C19.1@4050.28,2590.28 cw(c4026.81,2566.81) 4060,2566.81 cw(c4093.19,2566.81) C19.1@4069.72,2590.28 ; 4050.68,2941.73 ccw(c4058.02,2937.49) v1@4049.83,2935.29 ; 4050.75,2939.75 ccw(c4042.56,2947.94) C22.1@4050.87,2956 ; C22.1@4052.93,2946.41 cw(c4052.56,2944) 4055,2944 ; C12.1@4053.11,2426.89 ccw(c4036.47,2443.53) 4060,2443.53 ccw(c4083.53,2443.53) C12.1@4066.89,2426.89 ; C19.1@4053.11,2593.11 cw(c4036.47,2576.47) 4060,2576.47 cw(c4083.53,2576.47) C19.1@4066.89,2593.11 ; 4053.62,2942.62 ccw(c4045.47,2950.77) C22.1@4053.74,2958.78 ; C22.1@4057.07,2946.41 ccw(c4057.44,2944) 4055,2944 ; C12.1@4060,2420 C19.1@4060,2600 4027,2633 4027,2932 C22.1@4055,2960 ; v1@4270,2934 cw(c4270,2921.93) 4278.54,2930.46 cw(c4287.07,2939) v1@4275,2939 ; v1(4270,2939) 4453,2756 ; C24.1@4280.28,4025.28 cw(c4256.81,4001.81) 4290,4001.81 cw(c4323.19,4001.81) C24.1@4299.72,4025.28 ; C24.1@4283.11,4028.11 cw(c4266.47,4011.47) 4290,4011.47 cw(c4313.53,4011.47) C24.1@4296.89,4028.11 ; C24.1@4290,4035 4290,3675 ; C14.1@4406.25,3545 ccw(c4373.06,3545) 4396.53,3568.47 ccw(c4420,3591.94) C14.1@4420,3558.75 ; C14.1@4410.25,3545 ccw(c4386.72,3545) 4403.36,3561.64 ccw(c4420,3578.28) C14.1@4420,3554.75 ; C14.1@4410.28,3535.28 cw(c4386.81,3511.81) 4420,3511.81 cw(c4453.19,3511.81) C14.1@4429.72,3535.28 ; C14.1@4413.11,3538.11 cw(c4396.47,3521.47) 4420,3521.47 cw(c4443.53,3521.47) C14.1@4426.89,3538.11 ; C13.1@4415.28,3409.72 ccw(c4391.81,3433.19) 4425,3433.19 ccw(c4458.19,3433.19) C13.1@4434.72,3409.72 ; C13.1@4418.11,3406.89 ccw(c4401.47,3423.53) 4425,3423.53 ccw(c4448.53,3423.53) C13.1@4431.89,3406.89 ; C13.1@4425,3400 4425,3470 4420,3475 C14.1@4420,3545 4381,3584 ; U1.107@4673.63,3014.21 4689,2998.84 4689,2979 4678,2968 4461,2968 4453,2960 4453,2756 ; U1.107@4685.62,2998.92 cw(c4677.46,2990.76) 4689,2990.76 ; 4785.28,2677 ccw(c4785.28,2694.32) U1.120@4797.53,2682.07 ; 4794.94,2677 ccw(c4794.94,2684.66) U1.120@4800.36,2679.24 ; U1.120@4796.86,2680.17 cw(c4793.02,2679.73) 4795.75,2677 ; U1.120@4798.92,2678.11 ccw(c4798.49,2674.27) 4795.75,2677 ; U1.120@4806,2682 4811,2687 4812.82,2687 U1.120@4812.82,2694.07 ; U1.120@4811.17,2692.42 cw(c4807.19,2688.44) 4812.82,2688.44 cw(c4818.45,2688.44) U1.120@4814.47,2692.42 ; U1.120@4824.81,2709.36 ccw(c4819.53,2714.64) 4827,2714.64 ; U1.120@4827,2712.03 ccw(c4830.79,2712.03) U1.120@4828.11,2709.36 ; v1@4841.46,2214.46 cw(c4828.1,2201.1) 4847,2201.1 ; v1@4841.51,2439.58 ccw(c4833.44,2447.86) 4845,2447.86 ; v1@4842.14,2213.9 cw(c4832.09,2199.46) 4849.41,2202.56 ; v1@4844.29,2217.29 cw(c4837.76,2210.76) 4847,2210.76 cw(c4852.24,2210.76) v1@4848.54,2214.46 ; v1(4845,2218) v1@4847,2216 ; v1(4845,2436) 4845,2447.86 ; C21.1@4847,2177.87 ccw(c4868.89,2177.87) C21.1@4856.45,2159.86 ; 4847,2185.49 ccw(c4874.16,2185.49) C21.1@4858.72,2163.15 ; 4847,2193.12 ccw(c4879.43,2193.12) C21.1@4860.99,2166.44 ; 4847,2200.75 ccw(c4884.7,2200.75) C21.1@4863.27,2169.73 ; 4847,2208.37 ccw(c4889.97,2208.37) C21.1@4865.54,2173.02 ; 4848.03,2210.24 cw(c4854.48,2211.4) v1@4849.1,2215.14 ; v1@4848.49,2439.58 cw(c4856.56,2447.86) 4845,2447.86 ; U1.94@4854.58,3195.16 U1.94@4872,3181 ; C21.1@4860,2151.25 cw(c4860,2118.06) 4883.47,2141.53 cw(c4906.94,2165) C21.1@4873.75,2165 ; C21.1@4860,2155.25 cw(c4860,2131.72) 4876.64,2148.36 cw(c4893.28,2165) C21.1@4869.75,2165 ; U1.94@4866.57,3179.87 cw(c4853.47,3166.77) 4872,3166.77 ; C21.1@4867.82,2176.31 cw(c4895.24,2216) v1@4847,2216 ; U1.94@4869.4,3182.7 cw(c4863.13,3176.43) 4872,3176.43 ; U1.94@4869.87,3179.87 cw(c4872.59,3177.16) U1.94@4872.59,3181 ; U1.94@4869.87,3183.17 ccw(c4875.11,3188.41) 4875.11,3181 ; U1.130@4936.04,2541.23 cw(c4930.42,2541.23) 4934.39,2537.25 cw(c4938.37,2533.27) U1.130@4938.37,2538.9 ; U1.130@4964.01,2570.16 ccw(c4951.95,2582.22) 4969,2582.22 ; U1.130@4965.96,2570.82 ccw(c4966.43,2574.43) 4969,2571.86 ; U1.130@4966.84,2567.33 ccw(c4961.61,2572.56) 4969,2572.56 ; U1.130@4967.97,2568.82 cw(c4971.57,2569.29) 4969,2571.86 ; v1@4968,3380 cw(c4968,3360.76) 4981.61,3374.36 ; v1@4968,3384 cw(c4968,3374.42) 4974.78,3381.19 ; v1(4968,3385) 4970.97,3385 U1.83@5007.69,3348.28 ; v1@4973,3385 ccw(c4977.9,3385) 4974.44,3381.53 ; U1.83@4991.72,3361.92 ccw(c4986.09,3361.92) 4990.07,3365.9 ccw(c4994.05,3369.88) U1.83@4994.05,3364.25 ; C6.1@5045,1516.25 ccw(c5045,1483.06) 5021.53,1506.53 ccw(c4998.06,1530) 5031.25,1530 ccw(c4998.06,1530) 5021.53,1553.47 ccw(c5045,1576.94) C6.1@5045,1543.75 ; C6.1@5045,1520.25 ccw(c5045,1496.72) 5028.36,1513.36 ccw(c5011.72,1530) 5035.25,1530 ccw(c5011.72,1530) 5028.36,1546.64 ccw(c5045,1563.28) C6.1@5045,1539.75 ; U？1.12@5050,4005 5135,4005 v1(5149.5,4019.5) ; v1@5064,3201 cw(c5051.93,3201) 5060.46,3192.46 cw(c5069,3183.93) v1@5069,3196 ; v1(5069,3201) 5049,3181 U1.94@4872,3181 ; U？1.12@5077.12,4002.88 cw(c5082.24,3997.76) 5082.24,4005 cw(c5082.24,4012.24) U？1.12@5077.12,4007.12 ; v1@5144.5,4019.5 cw(c5132.43,4019.5) 5140.96,4010.96 cw(c5149.5,4002.43) v1@5149.5,4014.5 ; C3.1@5215,1530 5258,1530 5260.99,1527.01 R19.2@5305,1527.01 5305,1283 5265.35,1243.35 K1.4@5265.35,1172.48 ; C3.1@5221.89,1523.11 cw(c5238.53,1506.47) 5238.53,1530 cw(c5238.53,1553.53) C3.1@5221.89,1536.89 ; C3.1@5224.72,1520.28 cw(c5248.19,1496.81) 5248.19,1530 cw(c5248.19,1563.19) C3.1@5224.72,1539.72 ; K1.4@5243.01,1159.97 ccw(c5212.82,1129.78) 5212.82,1172.48 ccw(c5212.82,1215.18) K1.4@5243.01,1184.99 ; K1.4@5245.83,1162.8 ccw(c5222.47,1139.44) 5222.47,1172.48 ccw(c5222.47,1205.52) K1.4@5245.83,1182.16 ; K1.4@5248.66,1165.63 ccw(c5232.13,1149.1) 5232.13,1172.48 ccw(c5232.13,1195.86) K1.4@5248.66,1179.33 ; K1.4@5252.85,1184.99 ccw(c5222.66,1215.18) 5265.35,1215.18 ccw(c5308.05,1215.18) K1.4@5277.86,1184.99 ; K1.4@5255.68,1182.16 ccw(c5232.32,1205.52) 5265.35,1205.52 ccw(c5298.39,1205.52) K1.4@5275.03,1182.16 ; K1.4@5258.51,1179.33 ccw(c5241.97,1195.86) 5265.35,1195.86 ccw(c5288.74,1195.86) K1.4@5272.2,1179.33 ; K1.4@5292.02,1167.03 cw(c5299.52,1164.6) 5299.52,1172.48 ; K1.4@5292.02,1177.93 ccw(c5299.52,1180.36) 5299.52,1172.48 ; R19.2@5295.28,1536.73 cw(c5271.81,1560.2) 5271.81,1527.01 cw(c5271.81,1493.82) 5295.28,1517.29 cw(c5271.81,1493.82) 5305,1493.82 cw(c5338.19,1493.82) R19.2@5314.72,1517.29 ; R19.2@5298.11,1533.9 cw(c5281.47,1550.54) 5281.47,1527.01 cw(c5281.47,1503.47) 5298.11,1520.12 cw(c5281.47,1503.47) 5305,1503.47 cw(c5328.53,1503.47) R19.2@5311.89,1520.12 ; v1(5389,4001) 5423,4035 U？1.34@5510,4035 5535,4035 5548,4048 5548,4164 5544,4168 5465.89,4168 5442,4191.89 5442,4369 5558,4485 5558,4668 5530,4696 5520,4696 ; v1@5389,4006 ccw(c5389,4018.07) 5397.54,4009.54 ccw(c5406.07,4001) v1@5394,4001 ; U1.61@5453.11,3334.36 5472.76,3354 5500,3354 ; U1.61@5466.76,3350.33 ccw(c5466.76,3355.96) 5470.73,3351.98 ccw(c5474.71,3348) U1.61@5469.09,3348 ; 5479.44,3354 cw(c5479.44,3321.44) v1@5502.46,3344.46 ; U？1.34@5482.88,4032.88 ccw(c5477.76,4027.76) 5477.76,4035 ccw(c5477.76,4042.24) U？1.34@5482.88,4037.12 ; 5489.1,3354 cw(c5489.1,3331.1) v1@5505.29,3347.29 ; 5498.76,3354 cw(c5498.76,3340.76) v1@5508.12,3350.12 ; v1@5501.19,3349.38 ccw(c5496.68,3350.68) 5500,3354 ; v1@5504.62,3352.81 cw(c5503.32,3357.32) 5500,3354 ; v1(5506,3348) 5500,3354 ; U1.16@5508.79,2568.79 5534.58,2543 5748,2543 5817,2474 6024,2474 6035,2485 C7.1@6035,2730 6062,2703 ; P1.26@5514.63,4702.52 cw(c5513.36,4696) 5520,4696 ; P1.26@5520,4730 5520,4696 ; U1.16@5522.43,2552.82 cw(c5522.43,2547.19) 5526.41,2551.17 cw(c5530.39,2555.15) U1.16@5524.76,2555.15 ; P1.26@5525.37,4702.52 ccw(c5526.64,4696) 5520,4696 ; U？1.34@5535,4038 ccw(c5535,4045.24) 5540.12,4040.12 ccw(c5545.24,4035) U？1.34@5538,4035 ; v1@5564.71,3166.83 ccw(c5560.34,3183.12) 5574.95,3174.69 ; v1(5566,3162) 5592.31,3188.31 U1.51@5592.31,3195.16 ; v1@5566,3167 ccw(c5566,3179.07) 5574.54,3170.54 ccw(c5583.07,3162) v1@5571,3162 ; v1@5569.84,3165.84 ccw(c5554.16,3181.52) U1.51@5576.34,3181.52 ; v1@5570.83,3163.29 cw(c5577.85,3165.18) 5571.56,3168.81 ; 5576.67,3172.67 ccw(c5567.81,3181.52) U1.51@5580.34,3181.52 ; 5583.5,3179.5 ccw(c5581.47,3181.52) U1.51@5584.34,3181.52 ; U1.51@5590.66,3193.52 cw(c5586.68,3189.54) 5592.31,3189.54 cw(c5597.93,3189.54) U1.51@5593.96,3193.52 ; P1.27@5620,4602 cw(c5620,4534.4) 5667.8,4582.2 cw(c5715.6,4630) P1.27@5648,4630 ; P1.27@5620,4606 cw(c5620,4548.06) 5660.97,4589.03 cw(c5701.94,4630) P1.27@5644,4630 ; P1.27@5620,4610 cw(c5620,4561.72) 5654.14,4595.86 cw(c5688.28,4630) P1.27@5640,4630 ; P1.27@5620,4614 cw(c5620,4575.37) 5647.31,4602.69 cw(c5674.63,4630) P1.27@5636,4630 ; P1.27@5620,4630 5902,4348 5902,4002 5892,3992 ; 5703,2799.12 ccw(c5711.84,2799.12) U1.31@5705.59,2792.87 ; U1.31@5717.58,2777.58 5703,2792.16 5703,2944 U1.38@5763.49,3004.49 ; v1@5723.46,1943.46 cw(c5714.93,1934.93) 5727,1934.93 cw(c5739.07,1934.93) v1@5730.54,1943.46 ; v1(5727,1947) 5727,1310 5864.52,1172.48 5882,1172.48 ; 5755.56,2996.56 cw(c5759.62,2992.5) U1.38@5759.62,2998.24 ; 5755.67,2996.67 ccw(c5751.78,3000.57) U1.38@5757.29,3000.57 ; U1.38@5773.26,3014.21 5814.05,3055 C17.1@6090,3055 ; U1.38@5786.9,3030.18 ccw(c5786.9,3035.81) 5790.88,3031.83 ccw(c5794.86,3027.85) U1.38@5789.23,3027.85 ; C25.1@5795.28,4010.28 cw(c5771.81,3986.81) 5805,3986.81 cw(c5838.19,3986.81) C25.1@5814.72,4010.28 ; C25.1@5798.11,4013.11 cw(c5781.47,3996.47) 5805,3996.47 cw(c5828.53,3996.47) C25.1@5811.89,4013.11 ; v1@5801.46,3670.54 ccw(c5792.93,3679.07) 5805,3679.07 ccw(c5817.07,3679.07) v1@5808.54,3670.54 ; v1(5805,3667) C25.1@5805,4020 5833,3992 5892,3992 ; C25.1@5805,4006.25 cw(c5805,3973.06) 5828.47,3996.53 cw(c5851.94,4020) C25.1@5818.75,4020 ; C25.1@5805,4010.25 cw(c5805,3986.72) 5821.64,4003.36 cw(c5838.28,4020) C25.1@5814.75,4020 ; v1@5817.5,2030.67 cw(c5823.54,2020.21) 5826.66,2031.88 cw(c5829.78,2043.53) v1@5819.33,2037.5 ; v1@5817.5,2039.33 ccw(c5823.54,2049.79) 5826.66,2038.12 ccw(c5829.78,2026.47) v1@5819.33,2032.5 ; v1@5818.54,2031.46 cw(c5827.07,2022.93) 5827.07,2035 cw(c5827.07,2047.07) v1@5818.54,2038.54 ; C5.1@5834.59,2026.02 ccw(c5815,2009.15) v1(5815,2035) ; C5.1@5834.59,2043.98 cw(c5815,2060.85) v1(5815,2035) ; C5.1@5835.28,2044.72 ccw(c5811.81,2068.19) 5845,2068.19 ccw(c5878.19,2068.19) C5.1@5854.72,2044.72 ; C4.1@5835.28,2140.28 cw(c5811.81,2116.81) 5845,2116.81 cw(c5878.19,2116.81) C4.1@5854.72,2140.28 ; C4.1@5835.28,2159.72 ccw(c5811.81,2183.19) 5845,2183.19 ccw(c5878.19,2183.19) C4.1@5854.72,2159.72 ; C5.1@5837.62,2028.64 ccw(c5823.73,2016.67) 5823.73,2035 ccw(c5823.73,2053.33) C5.1@5837.62,2041.36 ; C5.1@5838.11,2041.89 ccw(c5821.47,2058.53) 5845,2058.53 ccw(c5868.53,2058.53) C5.1@5851.89,2041.89 ; C4.1@5838.11,2143.11 cw(c5821.47,2126.47) 5845,2126.47 cw(c5868.53,2126.47) C4.1@5851.89,2143.11 ; C4.1@5838.11,2156.89 ccw(c5821.47,2173.53) 5845,2173.53 ccw(c5868.53,2173.53) C4.1@5851.89,2156.89 ; C18.1@5840.28,2265.28 cw(c5816.81,2241.81) 5850,2241.81 cw(c5883.19,2241.81) C18.1@5859.72,2265.28 ; C18.1@5843.11,2268.11 cw(c5826.47,2251.47) 5850,2251.47 cw(c5873.53,2251.47) C18.1@5856.89,2268.11 ; v1(5844.12,3201) 5860,3216.88 C16.1@5860,3385 ; v1@5844.12,3206 ccw(c5844.12,3218.07) 5852.66,3209.54 ccw(c5861.19,3201) v1@5849.12,3201 ; C10.1@5845.28,3480.28 cw(c5821.81,3456.81) 5855,3456.81 cw(c5888.19,3456.81) C10.1@5864.72,3480.28 ; C10.1@5845.28,3499.72 ccw(c5821.81,3523.19) 5855,3523.19 ccw(c5888.19,3523.19) C10.1@5864.72,3499.72 ; C10.1@5848.11,3483.11 cw(c5831.47,3466.47) 5855,3466.47 cw(c5878.53,3466.47) C10.1@5861.89,3483.11 ; C10.1@5848.11,3496.89 ccw(c5831.47,3513.53) 5855,3513.53 ccw(c5878.53,3513.53) C10.1@5861.89,3496.89 ; C18.1@5850,2275 5850,2215 5845,2210 C4.1@5845,2150 C5.1@5845,2035 v1(5815,2035) ; C16.1@5850.28,3375.28 cw(c5826.81,3351.81) 5860,3351.81 cw(c5893.19,3351.81) C16.1@5869.72,3375.28 ; C16.1@5850.28,3394.72 ccw(c5826.81,3418.19) 5860,3418.19 ccw(c5893.19,3418.19) C16.1@5869.72,3394.72 ; C15.1@5850.28,3570.28 cw(c5826.81,3546.81) 5860,3546.81 cw(c5893.19,3546.81) C15.1@5869.72,3570.28 ; C16.1@5853.11,3378.11 cw(c5836.47,3361.47) 5860,3361.47 cw(c5883.53,3361.47) C16.1@5866.89,3378.11 ; C16.1@5853.11,3391.89 ccw(c5836.47,3408.53) 5860,3408.53 ccw(c5883.53,3408.53) C16.1@5866.89,3391.89 ; C15.1@5853.11,3573.11 cw(c5836.47,3556.47) 5860,3556.47 cw(c5883.53,3556.47) C15.1@5866.89,3573.11 ; C16.1@5860,3371.25 cw(c5860,3338.06) 5883.47,3361.53 cw(c5906.94,3385) C16.1@5873.75,3385 ; C16.1@5860,3375.25 cw(c5860,3351.72) 5876.64,3368.36 cw(c5893.28,3385) C16.1@5869.75,3385 ; C15.1@5867.07,3573.29 cw(c5882.69,3558.47) 5882.69,3580 cw(c5882.69,3601.53) C15.1@5867.07,3586.71 ; C15.1@5869.97,3570.54 cw(c5892,3549.64) v1(5892,3580) ; C15.1@5869.97,3589.46 ccw(c5892,3610.36) v1(5892,3580) ; v1@5887.67,3577.5 ccw(c5877.22,3571.47) 5880.34,3583.12 ccw(c5883.46,3594.79) v1@5889.5,3584.33 ; v1@5887.67,3582.5 cw(c5877.22,3588.53) 5880.34,3576.88 cw(c5883.46,3565.21) v1@5889.5,3575.67 ; v1@5888.46,3576.46 ccw(c5879.93,3567.93) 5879.93,3580 ccw(c5879.93,3592.07) v1@5888.46,3583.54 ; K4.2@5900.03,1162.76 ccw(c5882,1150.9) 5882,1172.48 ; K4.2@5900.03,1182.2 cw(c5882,1194.06) 5882,1172.48 ; K4.2@5903.37,1164.96 ccw(c5889.42,1155.78) 5889.42,1172.48 ccw(c5889.42,1189.18) K4.2@5903.37,1180 ; K4.2@5912.14,1184.99 ccw(c5881.95,1215.18) 5924.65,1215.18 ccw(c5967.34,1215.18) K4.2@5937.15,1184.99 ; K4.2@5914.97,1182.16 ccw(c5891.61,1205.52) 5924.65,1205.52 ccw(c5957.68,1205.52) K4.2@5934.32,1182.16 ; K4.2@5917.8,1179.33 ccw(c5901.26,1195.86) 5924.65,1195.86 ccw(c5948.03,1195.86) K4.2@5931.49,1179.33 ; K3.2@5924.65,1517.48 5925,1517.48 5963,1479.48 ; K3.2@5934.49,1499.8 cw(c5934.49,1480.01) 5948.48,1494 ; K3.2@5940.09,1516.51 ccw(c5963.29,1512.49) 5946.64,1495.84 ; K4.2@5941.34,1165.63 cw(c5957.87,1149.1) 5957.87,1172.48 cw(c5957.87,1195.86) K4.2@5941.34,1179.33 ; K3.2@5944.03,1515.83 ccw(c5972.58,1510.88) 5952.09,1490.39 ; K4.2@5944.17,1162.8 cw(c5967.53,1139.44) 5967.53,1172.48 cw(c5967.53,1205.52) K4.2@5944.17,1182.16 ; K4.2@5946.99,1159.97 cw(c5977.18,1129.78) 5977.18,1172.48 cw(c5977.18,1215.18) K4.2@5946.99,1184.99 ; K3.2@5947.97,1515.14 ccw(c5981.88,1509.27) 5957.55,1484.93 ; K3.2@5951.91,1514.46 ccw(c5991.17,1507.66) 5963,1479.48 ; C7.1@6025.28,2720.28 cw(c6001.81,2696.81) 6035,2696.81 cw(c6068.19,2696.81) C7.1@6044.72,2720.28 ; C7.1@6028.11,2723.11 cw(c6011.47,2706.47) 6035,2706.47 cw(c6058.53,2706.47) C7.1@6041.89,2723.11 ; C7.1@6035,2716.25 cw(c6035,2683.06) 6058.47,2706.53 cw(c6081.94,2730) C7.1@6048.75,2730 ; C7.1@6035,2720.25 cw(c6035,2696.72) 6051.64,2713.36 cw(c6068.28,2730) C7.1@6044.75,2730 ; C11.1@6080.28,2914.72 ccw(c6056.81,2938.19) 6090,2938.19 ccw(c6123.19,2938.19) C11.1@6099.72,2914.72 ; C20.1@6080.28,3224.72 cw(c6056.81,3248.19) 6056.81,3215 cw(c6056.81,3181.81) 6080.28,3205.28 cw(c6056.81,3181.81) 6090,3181.81 cw(c6123.19,3181.81) C20.1@6099.72,3205.28 ; C11.1@6083.11,2911.89 ccw(c6066.47,2928.53) 6090,2928.53 ccw(c6113.53,2928.53) C11.1@6096.89,2911.89 ; C20.1@6083.11,3221.89 cw(c6066.47,3238.53) 6066.47,3215 cw(c6066.47,3191.47) 6083.11,3208.11 cw(c6066.47,3191.47) 6090,3191.47 cw(c6113.53,3191.47) C20.1@6096.89,3208.11 ; C11.1@6090,2891.25 cw(c6090,2858.06) 6113.47,2881.53 cw(c6136.94,2905) C11.1@6103.75,2905 ; C11.1@6090,2895.25 cw(c6090,2871.72) 6106.64,2888.36 cw(c6123.28,2905) C11.1@6099.75,2905 ; C17.1@6096.89,3048.11 ccw(c6113.53,3031.47) 6090,3031.47 ccw(c6066.47,3031.47) 6083.11,3048.11 ccw(c6066.47,3031.47) 6066.47,3055 ccw(c6066.47,3078.53) 6083.11,3061.89 ccw(c6066.47,3078.53) 6090,3078.53 ccw(c6113.53,3078.53) C17.1@6096.89,3061.89 ; C17.1@6099.72,3045.28 ccw(c6123.19,3021.81) 6090,3021.81 ccw(c6056.81,3021.81) 6080.28,3045.28 ccw(c6056.81,3021.81) 6056.81,3055 ccw(c6056.81,3088.19) 6080.28,3064.72 ccw(c6056.81,3088.19) 6090,3088.19 ccw(c6123.19,3088.19) C17.1@6099.72,3064.72 ; C1.2@6162.01,4626.25 cw(c6162.01,4593.06) 6185.48,4616.53 cw(c6208.95,4640) 6175.76,4640 cw(c6208.95,4640) 6185.48,4663.47 cw(c6162.01,4686.94) C1.2@6162.01,4653.75 ; C1.2@6162.01,4630.25 cw(c6162.01,4606.72) 6178.65,4623.36 cw(c6195.29,4640) 6171.76,4640 cw(c6195.29,4640) 6178.65,4656.64 cw(c6162.01,4673.28) C1.2@6162.01,4649.75 ; 6189.61,4667.6 ccw(c6142.22,4715) C2.2@6209.24,4715 ; 6196.44,4674.43 ccw(c6155.87,4715) C2.2@6213.24,4715 ; 6203.27,4681.26 ccw(c6169.53,4715) C2.2@6217.24,4715 ; 6210.1,4688.09 ccw(c6183.19,4715) C2.2@6221.24,4715 ; 6216.93,4694.92 ccw(c6196.84,4715) C2.2@6225.24,4715 ; C2.2@6222.99,4715 6222.99,4700.98 C1.2@6162.01,4640 6292,4510.01 6292,4408 ; Q1.2@6239.2,4053.26 ccw(c6222.46,4036.51) 6222.46,4060.2 ccw(c6222.46,4083.88) Q1.2@6239.2,4067.13 ; Q1.2@6242.03,4056.09 ccw(c6232.11,4046.17) 6232.11,4060.2 ccw(c6232.11,4074.22) Q1.2@6242.03,4064.3 ; Q1.2@6272.57,4055.68 cw(c6280,4051.82) 6280,4060.2 ; Q1.2@6272.57,4064.71 ccw(c6280,4068.57) 6280,4060.2 ; R18.1@6301.25,4385 cw(c6268.06,4385) 6291.53,4361.53 cw(c6315,4338.06) 6315,4371.25 cw(c6315,4338.06) 6338.47,4361.53 cw(c6361.94,4385) R18.1@6328.75,4385 ; R18.1@6301.25,4385.2 ccw(c6269.66,4385.65) 6292,4408 ; R18.1@6305.25,4385 cw(c6281.72,4385) 6298.36,4368.36 cw(c6315,4351.72) 6315,4375.25 cw(c6315,4351.72) 6331.64,4368.36 cw(c6348.28,4385) R18.1@6324.75,4385 ; R18.1@6305.25,4385.14 ccw(c6282.85,4385.46) 6298.69,4401.31 ccw(c6314.54,4417.15) R18.1@6314.86,4394.75 ; C8.1@6306.25,2730 cw(c6273.06,2730) 6296.53,2706.53 cw(c6320,2683.06) C8.1@6320,2716.25 ; C8.1@6310.25,2730 cw(c6286.72,2730) 6303.36,2713.36 cw(c6320,2696.72) C8.1@6320,2720.25 ; R18.1@6314.8,4398.75 cw(c6314.35,4430.34) 6292,4408 ; C8.1@6320,2730 6266,2676 6089,2676 6062,2703 ; K5.2@6377.3,1159.97 ccw(c6347.11,1129.78) 6347.11,1172.48 ccw(c6347.11,1215.18) K5.2@6377.3,1184.99 ; K5.2@6380.13,1162.8 ccw(c6356.77,1139.44) 6356.77,1172.48 ccw(c6356.77,1205.52) K5.2@6380.13,1182.16 ; K5.2@6382.96,1165.63 ccw(c6366.42,1149.1) 6366.42,1172.48 ccw(c6366.42,1195.86) K5.2@6382.96,1179.33 ; K5.2@6409.49,1186.16 ccw(c6409.49,1208.37) 6425.19,1192.67 ; K5.2@6409.49,1190.16 ccw(c6409.49,1222.02) 6432.02,1199.5 ; K5.2@6415.17,1172.48 cw(c6439.73,1172.48) K5.2@6422.37,1189.85 ; K5.2@6419.17,1172.48 cw(c6453.39,1172.48) 6429.2,1196.68 ; K5.2@6423.17,1172.48 cw(c6467.05,1172.48) 6436.02,1203.5 ; K5.2@6427.17,1172.48 cw(c6480.71,1172.48) 6442.85,1210.33 ; P2.43@6620.2,3984.8 ccw(c6572.4,4032.6) 6640,4032.6 ccw(c6707.6,4032.6) P2.43@6659.8,3984.8 ; P2.43@6623.03,3981.97 ccw(c6582.06,4022.94) 6640,4022.94 ccw(c6697.94,4022.94) P2.43@6656.97,3981.97 ; P2.43@6625.86,3979.14 ccw(c6591.72,4013.28) 6640,4013.28 ccw(c6688.28,4013.28) P2.43@6654.14,3979.14 ; P2.43@6628.69,3976.31 ccw(c6601.37,4003.63) 6640,4003.63 ccw(c6678.63,4003.63) P2.43@6651.31,3976.31 ; P2.43@6640,3965 6640,4294 6624,4310 6390,4310 R18.1@6315,4385 ; P5.5@6692.14,1517.16 ccw(c6689,1516.84) 6689,1520 ; P5.5@6692.14,1522.84 cw(c6689,1523.16) 6689,1520 ; P5.5@6700.2,1539.8 ccw(c6652.4,1587.6) 6720,1587.6 ccw(c6787.6,1587.6) P5.5@6739.8,1539.8 ; P5.6@6700.2,1600.2 cw(c6652.4,1552.4) 6720,1552.4 cw(c6787.6,1552.4) P5.6@6739.8,1600.2 ; P5.5@6703.03,1536.97 ccw(c6662.06,1577.94) 6720,1577.94 ccw(c6777.94,1577.94) P5.5@6736.97,1536.97 ; P5.6@6703.03,1603.03 cw(c6662.06,1562.06) 6720,1562.06 cw(c6777.94,1562.06) P5.6@6736.97,1603.03 ; P5.5@6705.86,1534.14 ccw(c6671.72,1568.28) 6720,1568.28 ccw(c6768.28,1568.28) P5.5@6734.14,1534.14 ; P5.6@6705.86,1605.86 cw(c6671.72,1571.72) 6720,1571.72 cw(c6768.28,1571.72) P5.6@6734.14,1605.86 ; P5.5@6708.69,1531.31 ccw(c6681.37,1558.63) 6720,1558.63 ccw(c6758.63,1558.63) P5.5@6731.31,1531.31 ; P5.6@6708.69,1608.69 cw(c6681.37,1581.37) 6720,1581.37 cw(c6758.63,1581.37) P5.6@6731.31,1608.69 ; P5.6@6720,1620 P5.5@6720,1520 6689,1520 ; P6.8@2690,1780.2 2643.86,1734.05 P6.7@2643.86,1429.8 P6.6@2860.39,1429.8 ; 2860.39,1343 2837,1319.61 2837,1198 C30.1@2865,1170 2899,1136 3641,1136 3649,1144 3649,1206 C31.1@3625,1230 3680,1285 C29.1@3680,1415 C28.1@3680,1530 3680,1580 3685,1585 C27.1@3685,1635 ; 2860.39,1343 P6.6@2860.39,1429.8 ; P6.6@2860.39,1429.8 2860.39,1473 ; 2860.39,1473 2885.98,1498.59 P6.5@2885.98,1542.01 3120.99,1542.01 3143,1520 ; P4.12@3005,3575 P4.10@3005,3475 P4.8@3005,3375 P4.6@3005,3275 P4.4@3005,3175 3046,3134 ; P4.12@3005,3575 3050,3530 ; 3046,3134 3257.75,3134 3370,3021.75 C32.1@3370,2980 3450,2900 3450,1910.37 3685,1675.37 C27.1@3685,1635 ; C33.1@3265,2340 3281,2324 ; 3281,2324 3281,2013.31 3569.08,1725.23 3594.77,1725.23 C27.1@3685,1635 ; 3643,4608 C26.1@3675,4640 ; C26.1@3675,4640 3723,4640 3738,4625 U3.4@3787.64,4625 U3.3@3787.64,4675 U3.2@3787.64,4725 ; v1@4049.83,2935.29 cw(c4054.55,2936.56) 4050.32,2939 ccw(c4054.55,2936.56) v1@4049.83,2935.29 ; 4055,2944 C22.1@4055,2960 ; C22.1@4055,2960 C9.1@4055,3055 4055,3310.84 4328.16,3584 4381,3584 ; 4290,3675 4381,3584 ; 4453,2756 4453,2720 4496,2677 4795.75,2677 ; 4752.25,3014 4750,3011.75 4750,2993 4729,2972 4729,2952 4739,2942 4761,2942 4827,2876 4827,2708.25 U1.120@4812.82,2694.07 ; 4752.25,3014 4778,3014 4810.6,2981.4 4874,2981.4 4939,2916.4 4939,2617 4969,2587 4969,2571.86 ; 4752.25,3014 4814.04,3075.79 4814.04,3102.04 4872,3160 U1.94@4872,3181 ; 4795.75,2677 U1.120@4812.82,2694.07 ; 4845,2447.86 4969,2571.86 ; v1@4847,2216 4847,2165 C21.1@4860,2165 5002,2023 5002,1573 C6.1@5045,1530 4896,1381 4896,1242 4912,1226 5029,1226 5082.52,1172.48 K1.4@5265.35,1172.48 ; K1.4@5265.35,1172.48 5299.52,1172.48 ; 5299.52,1172.48 5339,1133 5842.52,1133 5882,1172.48 ; C16.1@5860,3385 5860,3435 5855,3440 C10.1@5855,3490 5855,3532 5860,3537 C15.1@5860,3580 v1(5892,3580) ; C16.1@5860,3385 6030,3215 C20.1@6090,3215 C17.1@6090,3055 ; 5882,1172.48 K4.2@5924.65,1172.48 ; 5892,3992 6026.8,3992 6095,4060.2 Q1.2@6255,4060.2 6280,4060.2 ; K4.2@5924.65,1172.48 6075,1172.48 6103.48,1144 6314,1144 6342.48,1172.48 K5.2@6399.65,1172.48 6405,1172.48 6673,1440.48 6673,1504 6689,1520 ; K4.2@5924.65,1172.48 5924.65,1245 5963,1283.35 5963,1479.48 ; 6062,2703 6194,2703 6199,2708 6199,2796 C11.1@6090,2905 C17.1@6090,3055 ; 6280,4060.2 6286,4066.2 6286,4356 R18.1@6315,4385 ; 6292,4408 R18.1@6315,4385